# EAGLE board PCB v17 (EAGLE 9.7.0)
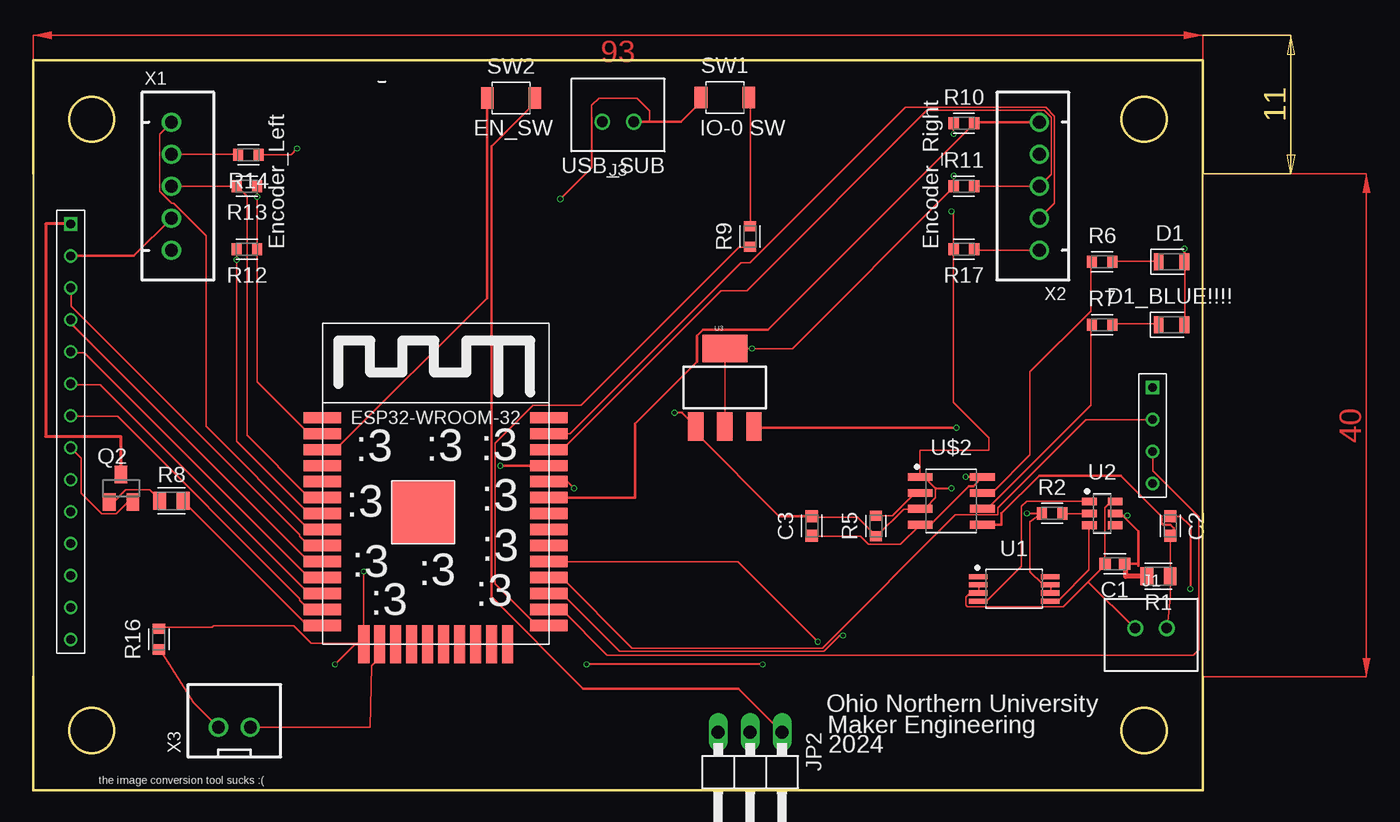
[diagram p0: board, top side]
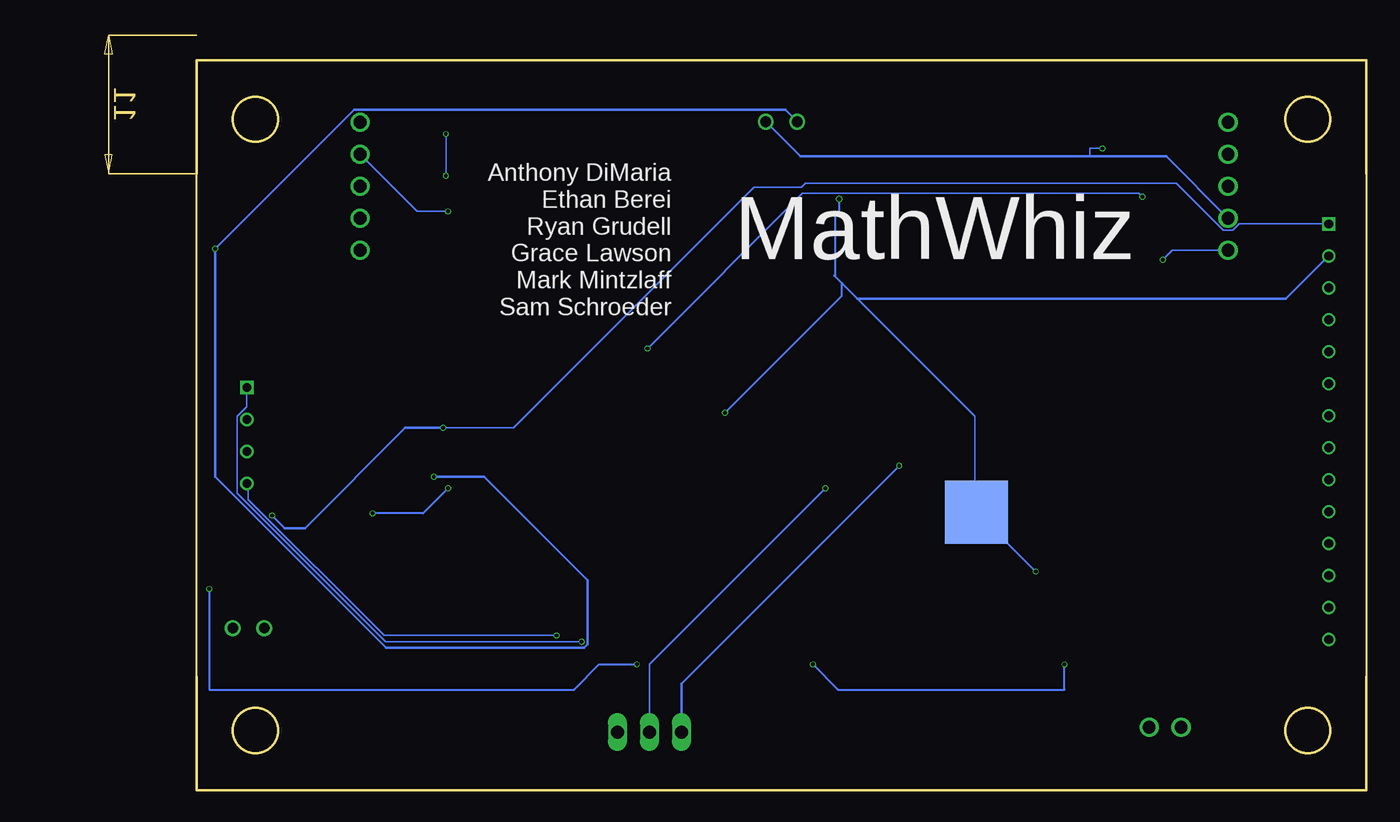
[diagram p1: board, bottom side, seen from below]

Size 93 x 58 mm. Coordinates in mm from the lower left corner, seen from the top.
Outline: 93,9 93,49 93,58 0,58 0,49 0,9 0,0 93,0 93,9
Outline: circle at 4.67,4.75 radius 1.78
Outline: circle at 88.33,4.75 radius 1.78
Outline: circle at 4.67,53.32 radius 1.78
Outline: circle at 88.33,53.32 radius 1.78
Copper layers (1*16): Top / Bottom
Stack-up Default Layer Stack: Top User Defined 0.035559375mm / Dielectric-1 User Defined 1.6mm / Bottom User Defined 0.035559375mm
Design rules: minimum copper width 5mil, minimum drill size 12mil, copper clearance wire_polygon to wire_polygon 5mil, copper clearance wire_polygon to pad_smd 5mil, copper clearance wire_polygon to via 5mil, copper clearance pad_smd to pad_smd 5mil, copper clearance pad_smd to via 5mil, copper clearance via to via 5mil, copper clearance smd to pad (same net) 5mil, copper clearance smd to via (same net) 5mil, copper clearance smd to smd (same net) 5mil, dimension clearance 8mil, via restrict clearance 0mil, restrict clearance 0mil, drill distance 6mil, keepout clearance 0mil

## Footprints (pad centres in the part's own frame; a part is rotated, then mirrored left to right if it is on the bottom)
CAPC1608X85 = smd 0.921 x 0.97: 1 -0.775,0; 2 0.775,0
LEDC2012X110N_FLAT-R = smd 0.762 x 1.362: A 1.025,0; C -1.025,0
B2B-XH-A = drill 0.84: 1 0,0; 2 2.5,0
1X03/90 = drill 1.016 long: 1 -2.54,-3.81; 2 0,-3.81; 3 2.54,-3.81
SOT23 = smd 1 x 1.4: 1 -0.95,-1.1; 2 0.95,-1.1; 3 0,1.1
RESC2012X65 = smd 1.031 x 1.42: 1 -0.919,0; 2 0.919,0
RESC1608X60 = smd 0.799 x 0.974: 1 -0.815,0; 2 0.815,0
SW2-2.6-3.0X2.5X1.2+0.4MM = smd 1 x 1.7: 1 -1.9,0; 2 1.9,0
SOP65P640X120-8 = smd 1.469 x 0.402: 1 -2.871,0.975; 2 -2.871,0.325; 3 -2.871,-0.325; 4 -2.871,-0.975; 5 2.871,-0.975; 6 2.871,-0.325; 7 2.871,0.325; 8 2.871,0.975
DW01A = smd 1.182 x 0.612: 1 -1.025,0.95; 2 -1.025,0; 3 -1.025,-0.95; 4 1.025,-0.95; 5 1.025,0; 6 1.025,0.95
SOT223 = smd 1.219 x 2.235: 1 -2.311,-3.099; 2 0,-3.099; 3 2.311,-3.099 | smd 3.6 x 2.2: 4 0,3.099
ESP32-WROOM = smd 3 x 0.9: 3V3 0,16.74; EN 0,15.47; GND1 0,18.01; GND3 18,18.01; IO0 18,1.5; IO4 18,2.77; IO5 18,6.58; IO12 0,1.5; IO14 0,2.77; IO16 18,4.04; IO17 18,5.31; IO18 18,7.85; IO19 18,9.12; IO21 18,11.66; IO22 18,15.47; IO23 18,16.74; IO25 0,6.58; IO26 0,5.31; IO27 0,4.04; IO32 0,9.12; IO33 0,7.85; IO34 0,11.66; IO35 0,10.39; NC 18,10.39; RX 18,12.93; SENSOR_VN 0,12.93; SENSOR_VP 0,14.2; TX 18,14.2 | smd 0.9 x 3: CLK 9.635,0; CMD 8.365,0; GND2 3.285,0; IO2 14.715,0; IO13 4.555,0; IO15 13.445,0; SD0 10.905,0; SD1 12.175,0; SD2 5.825,0; SD3 7.095,0 | smd 5 x 5: GND4 8,10.5 | smd 5 x 5 bottom: GND5 8,10.5
SOIC127P601X152-8N = smd 1.963 x 0.605: 1 -2.477,1.905; 2 -2.477,0.635; 3 -2.477,-0.635; 4 -2.477,-1.905; 5 2.477,-1.905; 6 2.477,-0.635; 7 2.477,0.635; 8 2.477,1.905
3.2"ILI9341 = drill 0.7: CLK 1,-23.86; CLK_SD 87,-21.62; CS 1,-6.08; CS_T 1,-26.4; DC 1,-11.16; DIN 1,-28.94; DO 1,-31.48; GND 1,-3.54; IRQ 1,-34.02; LED 1,-18.78; MISO 1,-21.32; MISO_SD 87,-19.08; MOSI 1,-13.7; MOST_SD 87,-16.54; RESET 1,-8.62; SCK 1,-16.24 | drill 0.7 square: CS_SD 87,-14; VCC 1,-1
JST-XH-05-PACKAGE-ROUND-PAD = drill 1.016: 1 -5.08,0; 2 -2.54,0; 3 0,0; 4 2.54,0; 5 5.08,0
JST-XH-02-PACKAGE-ROUND-PAD = drill 1.016: 1 -1.27,0; 2 1.27,0

## Placement (x,y rotation side)
C1  0.1u  [CAPC1608X85]  86,18 180 top
C2  10u  [CAPC1608X85]  90.42,21 270 top
C3  0.1u  [CAPC1608X85]  61.9,21 90 top
D1  LED_RED  [LEDC2012X110N_FLAT-R]  90.5,42 0 top
D1_BLUE!!!!  LED_RED  [LEDC2012X110N_FLAT-R]  90.5,37 0 top
J1  B2B-XH-A  [B2B-XH-A]  87.62,12.88 0 top
J3  B2B-XH-A  [B2B-XH-A]  47.75,53.12 180 top
JP2  [1X03/90]  57,0.81 180 top
Q2  PMOSFET  [SOT23]  7,24 0 top
R1  100  [RESC2012X65]  89.47,17 180 top
R2  1k  [RESC1608X60]  81,22 0 top
R5  [RESC1608X60]  67,21 90 top
R6  1k  [RESC1608X60]  85,42 0 top
R7  1k  [RESC1608X60]  85,37 0 top
R8  200  [RESC2012X65]  11,23 0 top
R9  10k  [RESC1608X60]  57,44 90 top
R10  10k  [RESC1608X60]  74,53 0 top
R11  10k  [RESC1608X60]  74,48 0 top
R12  10k  [RESC1608X60]  17,43 180 top
R13  10k  [RESC1608X60]  17,48 180 top
R14  1k  [RESC1608X60]  17.12,50.5 180 top
R16  1k  [RESC1608X60]  10,12 90 top
R17  1k  [RESC1608X60]  74,43 180 top
SW1  B3U-1000P-2P-SMD  [SW2-2.6-3.0X2.5X1.2+0.4MM]  55,55.06 0 top
SW2  B3U-1000P-2P-SMD  [SW2-2.6-3.0X2.5X1.2+0.4MM]  38,55 0 top
U1  FS8205ANE_TSSOP8  [SOP65P640X120-8]  78,16 0 top
U2  DW01A  [DW01A]  85,22 0 top
U3  [SOT223]  55,32 0 top
U$1  ESP32-WROOM  [ESP32-WROOM]  23,11.59 0 top
U$2  TP4056  [SOIC127P601X152-8N]  73,23 0 top
U$3  3.2"ILI9341  [3.2"ILI9341]  2,46 0 top
X1  JST-XH-05-PIN-ROUND-PAD  [JST-XH-05-PACKAGE-ROUND-PAD]  11,48 270 top
X2  JST-XH-05-PIN-ROUND-PAD  [JST-XH-05-PACKAGE-ROUND-PAD]  80,48 90 top
X3  JST-XH-02-PIN-ROUND-PAD  [JST-XH-02-PACKAGE-ROUND-PAD]  16,5 0 top

## Library data of the parts
C1-C3 = Capacitor; CATEGORY: Capacitor
D1 D1_BLUE!!!! = LED; CATEGORY: LED; COLOR: RED; DESCRIPTION: CHIP LED FLAT; SUB-CATEGORY: CHIP; TYPE: FLAT_TOP
J1 J3 = Connector; CATEGORY: Header; DESCRIPTION: Connector Header Through Hole 2 position 0.098" (2.50mm); MANUFACTURER: JST Sales America Inc.; MPN: B2B-XH-A(LF)(SN); OPERATING_TEMPERATURE: -25°C ~ 85°C; PART_STATUS: ACTIVE; PITCH: 0.098" (2.50mm); ROHS_COMPLIANCE: ROHS3 Compliant; SERIES: XH; SUB_CATEGORY: Rectangular Connectors; TYPE: Header, Male Pin, Board to Cable/Wire, Through Hole
JP2 = pinhead
Q2 = Transistor; CATEGORY: Transistor; SUB-CATEGORY: MOSFET; TYPE: P-Channel
R1 R2 R5-R14 R16 R17 = Resistor; CATEGORY: Resistor; SUB-CATEGORY: Fixed
SW1 SW2 = Fidget_Spinner; MPN: B3U-1000P-2P-SMD
U1 = Library; CATEGORY: IC_Clock-Timing; CURRENT-SUPPLY: 10mA; DESCRIPTION: IC OSC SGL TIMER 100KHZ 8TSSOP; FREQUENCY: 100kHz; MANUFACTURER: Texas Instruments; MPN: NE555PW; OPERATING_TEMP: 0°C to 70°C; PART_STATUS: Active; ROHS_COMPLIANT: ROHS3 Compliant; SUB-CATEGORY: Timer
U2 = Library1
U3 = SparkFun-IC-Power; PROD_ID: VREG-08170
U$1 = Library
U$2 = TP4056
U$3 = ILI9341
X1-X3 = Rembrandt Electronics - JST XH Connectors v1-0

## Nets
AGND: C2.1 C3.2 J3.1 R2.1 R5.1 R14.1 R16.2 R17.2 SW1.1 U1.6 U1.7 U3.1 U$1.GND2 U$1.GND5 U$2.1 U$2.3 U$3.GND X1.4 X2.4
BAT+: C2.2 J1.2 R1.1 U$2.5
BAT-: C1.2 J1.1 U1.2 U1.3 U2.6
D12: U1.8
DC: U$1.IO26 U$3.DC
EN2: R12.2 U$1.IO35 X1.5
EXT_SW: U$1.IO13 X3.2
MOSI: U$1.IO27 U$3.MOSI
N$1: R10.1 R11.1 R12.1 R13.1 U3.2 U3.4 U$1.3V3
N$2: U1.4 U2.1
N$3: U1.5 U2.3
N$4: R2.2 U2.2
N$7: R6.1 U$2.7
N$8: R5.2 U$2.2
N$9: D1_BLUE!!!!.C R7.2
N$10: R7.1 U$2.6
N$11: D1.C R6.2
N$12: R9.1 U$1.IO0
N$13: JP2.2 U$1.RX
N$14: JP2.3 U$1.TX
N$15: SW2.1 U$1.EN
N$16: R8.2 U$1.IO12
N$17: U$1.IO25 U$3.RESET
N$18: R17.1 X2.1
N$19: Q2.1 R8.1
N$20: JP2.1 SW2.2
N$21: R10.2 U$1.IO21 X2.5
N$22: R13.2 U$1.IO34 X1.3
N$24: U$1.IO23 X2.2
N$25: U$1.IO32 X1.1
N$27: R9.2 SW1.2
N$28: Q2.2 U$3.LED
N$29: U$1.IO17 U$3.MOST_SD
N$31: U$1.IO16 U$3.CLK_SD
N$33: R14.2 X1.2
N$35: R16.1 X3.1
N$37: U$1.IO4 U$3.MISO_SD
N$39: U$1.IO5 U$3.CS_SD
RESET: U$1.IO33 U$3.CS
SCK: U$1.IO14 U$3.SCK
VCC: C1.1 Q2.3 R1.2 U2.5 U3.3 U$3.VCC
VIN: C3.1 D1.A D1_BLUE!!!!.A J3.2 U$2.4 U$2.8
YOURMOM: R11.2 U$1.IO22 X2.3

## Tracks (layer width: path | path; a pad name or v marks a point on that pad's centre or on a via)
AGND  (via drill 0.3, 0.35)
  Top 0.127: R2.1 80.06,21.91 79.25,21.32 79.25,17.38 80.26,16.37 80.77,16.37 U1.7 80.9,16.24 80.9,15.73 U1.6 | R16.2 10.03,12.94 14.22,12.94 14.35,13.06 20.7,13.06 22.1,11.67 26.16,11.67 U$1.GND2 26.29,11.67 v26.29,17.38 | C3.2 61.98,21.7 65.53,21.7 66.93,20.3 R5.1 67.06,20.18 69.22,22.34 70.48,22.34 U$2.3 70.61,22.46 70.99,22.46 71.75,23.22 71.75,23.99 70.87,24.88 70.61,24.88 U$2.1 70.52,27 76,27 76,28 73.19,30.82 R17.2 73.19,45.81 v73,46 | v21,51 20.5,50.5 R14.1 | 44.42,53 44.42,54.42 45,55 48,55 49,54 49,53.12
  Top 0.152: v41.91,46.97 44.42,49.48 44.42,53 44.42,53.47 | U3.1 51.59,30 v51,30 | 71.75,23.99 71.77,24 v73,24 | v79,22 79.98,22 80.06,21.91 | C2.1 91.22,21.77 92,21 v92,16 | v58,10 v44,10 | v24,10 25.59,11.59 U$1.GND2
  Top 0.203: U3.1 52.69,28.39 59.31,21.77 C3.2 | SW1.1 53.1,54.71 51.52,53.12 49,53.12 J3.1 | X1.4 8,42.46 U$3.GND
  Bottom 0.127: 42.29,40.88 42.21,40.79 41.71,40.29 31.11,29.7 31.11,22.21 U$1.GND5 30.99,22.08 v26.29,17.38 | 22,50.37 22,51 v21,51 | X2.4 75.46,46 v73,46
  Bottom 0.152: 42.21,40.79 42.21,45.79 41.91,46.09 v41.91,46.97 | v51,30 41.71,39.29 41.71,40.29 | v73,24 75,22 v79,22 | v92,16 92,8 63,8 61,10 v58,10 | v44,10 42,8 24,8 v24,10
  Bottom 0.203: U$3.GND 6.4,39.06 40.47,39.06 41.71,40.29 42.29,40.88 | X1.4 15.91,50.37 22,50.37 45,50.37 J3.1
BAT+
  Top 0.127: 90.68,20.8 C2.2 90.42,17.03 R1.1 90.39,15.41 90.17,12.94 J1.2
  Top 0.203: U$2.5 77,21.09 77,22 80,25 86.49,25 89.71,21.78 89.71,21.22 89.84,21.09 90.4,21.09 90.68,20.8
BAT-
  Top 0.127: U1.2 75.18,16.24 75.18,15.73 U1.3 75.06,15.6 74.42,15.6 74.17,15.35 74.17,14.71 74.3,14.59 81.92,14.59 83.82,16.49 | U2.6 85.98,22.84 85.6,22.84 85.22,22.46 85.22,18.02 C1.2 85.22,17.89 83.82,16.49 | 83.82,16.49 83.95,16.49 87.5,12.94 J1.1
DC
  Top 0.127: U$3.DC 3.05,34.78 4.06,34.78 21.84,17 22.99,17 U$1.IO26
EN2  (via drill 0.3)
  Top 0.127: U$1.IO35 21.95,21.98 16.18,27.75 v16.18,42.16 | v16.18,42.16 R12.2 v16.18,42.16
  Bottom 0.127: X1.5 15.42,42.92 v16.18,42.16
EXT_SW
  Top 0.127: U$1.IO13 27.43,11.54 27.43,10.4 26.92,9.89 26.8,5 X3.2
MOSI
  Top 0.127: U$3.MOSI 3.05,32.24 5.33,32.24 21.84,15.73 22.99,15.73 U$1.IO27
N$1  (via drill 0.3)
  Top 0.127: v57.16,35.1 60.37,35.1 73.19,47.91 R11.1 v73.19,48.84 | v57.16,35.1 U3.4 | R10.1 v73.19,52.16 | U$1.3V3 21.95,28.33 17.82,32.47 R12.1 v17.82,47.16 | v17.82,47.16 R13.1 v17.82,47.16 | U3.2 U3.4 | v57.16,35.1 U3.4
  Bottom 0.127: v73.19,52.16 v73.19,48.84 | v17.82,47.16 18.08,47.43 44.83,47.43 v57.16,35.1
N$2
  Top 0.127: U2.1 83.95,22.97 80.39,22.97 79,22.97 78.58,22.55 78.58,17.81 75.87,15.1 75.18,15.1 U1.4
N$3
  Top 0.127: U2.3 83.95,20.94 83.95,17.51 81.53,15.1 80.9,15.1 U1.5
N$4
  Top 0.127: R2.2 81.9,21.95 83.95,21.95 U2.2
N$7
  Top 0.127: R6.1 84.07,41.89 84.07,38.08 79.25,33.26 79.25,26.65 76.33,23.73 75.56,23.73 U$2.7
N$8
  Top 0.127: R5.2 67.06,21.83 68.33,21.83 70.1,23.61 70.48,23.61 U$2.2
N$9
  Top 0.127: R7.2 85.85,37.07 89.41,37.07 D1_BLUE!!!!.C
N$10
  Top 0.127: R7.1 84.07,36.94 84.07,30.59 75.95,22.46 75.56,22.46 U$2.6
N$11
  Top 0.127: R6.2 85.85,42.02 89.41,42.02 D1.C
N$12
  Top 0.127: R9.1 56.9,43.16 56.13,43.16 43.56,30.59 39.75,30.59 36.73,27.56 36.73,16.42 39.95,13.19 40.9,13.19 U$1.IO0
N$13  (via drill 0.3)
  Top 0.127: U$1.RX 42.48,24.52 v43,24
  Bottom 0.127: v43,24 57,10 JP2.2
N$14  (via drill 0.3)
  Top 0.203: v37.14,25.79 U$1.TX
  Bottom 0.203: v37.14,25.79 54.46,8.48 JP2.3
N$15
  Top 0.127: 24.13,27.16 23.11,27.16 U$1.EN
  Top 0.203: SW2.1 36.1,39.11 24.15,27.16 U$1.EN
N$16
  Top 0.127: R8.2 11.94,22.97 21.72,13.19 22.99,13.19 U$1.IO12
N$17
  Top 0.127: U$3.RESET 3.05,37.32 3.05,37.07 21.84,18.27 22.99,18.27 U$1.IO25
N$18
  Top 0.127: R17.1 74.89,42.92 X2.1
N$19
  Top 0.127: Q2.1 6.1,22.97 6.48,22.97 7.37,23.86 9.27,23.86 10.03,23.1 R8.1
N$20
  Top 0.203: SW2.2 39.9,54.65 36.43,51.18 36.43,15.39 43.74,8.08 56.08,8.08 JP2.1
N$21
  Top 0.203: X2.5 74.89,53.08 R10.2 58.41,36.6 53.28,36.6 52.78,36.1 52.78,34.04 47.85,29.11 47.85,23.25 U$1.IO21
N$22
  Top 0.127: X1.3 R13.2 17,47.19 17,28.2 21.95,23.25 U$1.IO34
N$24
  Top 0.127: U$1.IO23 42.69,28.33 56.29,41.93 56.99,41.93 69.34,54.29 80.5,54.29 81.21,53.58 81.21,46.67 X2.2
N$25
  Top 0.127: X1.1 10.05,52.13 10.05,47.6 11.02,46.64 11.17,46.64 13.74,44.06 13.74,28.92 21.95,20.71 U$1.IO32
N$27
  Top 0.127: R9.2 57.02,44.94 57.02,54.97 SW1.2
N$28
  Top 0.127: Q2.2 7.87,22.84 7.49,22.84 6.6,21.95 5.46,21.95 3.81,23.61 3.81,26.4 3.05,27.16 U$3.LED
N$29
  Top 0.127: U$3.MOST_SD 88.9,29.45 83.69,29.45 76.71,22.46 76.71,21.93 76.65,21.87 73.32,21.87 62.74,11.29 47.62,11.29 42.04,16.87 41.02,16.87 U$1.IO17
N$31  (via drill 0.3)
  Top 0.127: v64.39,12.3 64.14,12.3 62.87,11.03 46.61,11.03 42.04,15.6 41.02,15.6 U$1.IO16
  Bottom 0.127: v64.39,12.3 78.11,12.3 88.9,23.1 88.9,24.37 U$3.CLK_SD
N$33
  Top 0.127: X1.2 16.27,50.54 R14.2
N$35
  Top 0.127: R16.1 10.03,11.29 12.76,6.97 X3.1
N$37
  Top 0.127: U$3.MISO_SD 89.03,26.91 89.03,25.38 92.66,21.75 92.66,11.15 92.24,10.73 45.64,10.73 42.04,14.33 41.02,14.33 U$1.IO4
N$39  (via drill 0.3)
  Top 0.127: v62.39,11.79 56.04,18.14 41.02,18.14 U$1.IO5
  Bottom 0.127: v62.39,11.79 77.98,11.79 89.79,23.61 89.79,29.7 89.03,30.46 89.03,31.99 U$3.CS_SD
RESET
  Top 0.127: U$3.CS 3.05,39.86 3.05,38.46 21.21,20.3 21.21,20.18 21.84,19.54 22.99,19.54 U$1.IO33
SCK
  Top 0.127: U$3.SCK 3.05,29.7 6.73,29.7 21.21,15.22 21.21,15.1 21.84,14.46 22.99,14.46 U$1.IO14
VCC  (via drill 0.3)
  Top 0.127: 6.6,25.13 6.99,25.13 Q2.3 | U2.5 86.11,21.95 86.4,21.95 | 86.87,18.02 C1.1 | 57.4,28.81 U3.3
  Top 0.203: v73.41,28.81 57.4,28.81 | 87.87,18 87.87,17.84 | 87.87,18 86.87,18 86.87,18.02 | 86.4,21.95 86.47,21.95 87.87,20.56 87.87,18 | v87,21.83 86.23,21.83 86.11,21.95
  Top 0.254: U$3.VCC 1,45 1,28.12 6.99,28.12 6.99,25.13
  Top 0.406: R1.2 86.87,17 86.87,18.02
  Bottom 0.127: v73.41,28.81 67.82,28.81 48.7,47.93 44.91,47.93 44.6,48.24 15.13,48.24 11.39,44.51 10.61,44.51 10.11,45 U$3.VCC
  Bottom 0.203: v87,21.83 86,20.83 84.39,20.83 76.41,28.81 v73.41,28.81
VIN  (via drill 0.3)
  Top 0.127: C3.1 61.98,20.18 65.79,20.18 66.42,19.54 68.96,19.54 70.48,21.06 U$2.4 | D1_BLUE!!!!.A 91.57,37.07 91.57,41.89 D1.A
  Top 0.203: v91.53,43.04 D1.A | v74.14,24.91 U$2.8 74.74,24.17 74.4,24.17 71.33,21.09 U$2.4
  Bottom 0.203: J3.2 46.2,54.07 80.49,54.07 v91.53,43.04 91.53,24.93 77.93,11.34 62.2,11.34 61.93,11.61 61.93,16.7 70.14,24.91 v74.14,24.91
YOURMOM
  Top 0.127: R11.2 X2.3 80.95,48.95 80.95,53.48 80.39,54.03 71.08,54.03 56.74,39.69 54.68,39.69 42.05,27.06 U$1.IO22
(copper drawn outside any net)
  shapes: Top area x2

## Text on the board
SilkscreenTop: EN_SW | IO-0 SW | USB_SUB | Encoder_Left | Encoder_Right | :3 | :3 | :3 | :3 | :3 | :3 | :3 | :3 | :3 | :3 | Ohio Northern University | Maker Engineering | 2024 | the image conversion tool sucks :(
SilkscreenBottom: Anthony DiMaria / Ethan Berei / Ryan Grudell / Grace Lawson / Mark Mintzlaff / Sam Schroeder | MathWhiz